# EAGLE board TALLER0 (EAGLE 7.6.0)

Size 100 x 80 mm. Coordinates in mm from the lower left corner, seen from the top.
Outline: 0,0 100,0 100,80 0,80 0,0
Copper layers (1*16): Top 0.035mm / dielectric 1.5mm / Bottom 0.035mm
Design rules "default": minimum track width 10mil, minimum drill 24mil, track to track 8mil, track to pad 8mil, pad to pad 8mil, via to via 8mil, smd to smd 8mil, copper to edge 40mil, drill to drill 8mil, minimum pad ring 10mil, minimum via ring 8mil, stop-mask expansion 4mil, vias tented up to drill 0mil, thermal gap 10mil

## Footprints (pad centres in the part's own frame; a part is rotated, then mirrored left to right if it is on the bottom)
DO-1N4148 = drill 0.9: A -3.81,0; C 3.81,0
DIL08 = drill 0.813 long: 1 -3.81,-3.81; 2 -1.27,-3.81; 3 1.27,-3.81; 4 3.81,-3.81; 5 3.81,3.81; 6 1.27,3.81; 7 -1.27,3.81; 8 -3.81,3.81
1X05-3.5MM = drill 1 pad 2.184: 1 7,0; 2 3.5,0; 3 0,0; 4 -3.5,0; 5 -7,0
JJM1C = drill 1.4: 1 4.05,5; 2 4.05,-5; NC -6.15,-5; NO -6.15,5 | drill 1.5: C 6.55,0
TO-5_V10 = drill 0.8 pad 1.4: 1 -2.7,0; 2 2.7,0
THUMBWHEELV = drill 1.4 pad 2.184: A -5,0; E 5,0; S 0,-0.5 | drill 3.2: SW1 -10,0; SW2 10,0
0207/10 = drill 0.813 pad 1.676 octagon: 1 -5.08,0; 2 5.08,0
320-938 = drill 2.007 octagon: 1 -2.388,4.013; 2 -2.388,0; 3 -2.388,-4.013; 4 2.388,4.013; 5 2.388,0; 6 2.388,-4.013
TO18 = drill 0.813 octagon: 1 -1.27,-1.27; 2 1.27,-1.27; 3 1.27,1.27

## Placement (x,y rotation side)
D1  [DO-1N4148]  -44.45,-48.26 0 top  (outside the outline)
IC1  LM741P  [DIL08]  39.37,44.45 0 top
J2  1X5  [1X05-3.5MM]  -27.94,-41.91 0 top  (outside the outline)
K1  JJM1-12V  [JJM1C]  -11.43,-29.21 0 top  (outside the outline)
PH1  V1060_32  [TO-5_V10]  -25.4,-27.94 0 top  (outside the outline)
POT2  THUMBPOTV  [THUMBWHEELV]  12.7,15.24 0 top
R1  [0207/10]  -13.97,-3.81 0 top  (outside the outline)
R2  [0207/10]  -13.97,-8.89 0 top  (outside the outline)
R3  [0207/10]  -13.97,-13.97 0 top  (outside the outline)
S1  [320-938]  -43.18,-34.29 0 top  (outside the outline)
T1  2N2222  [TO18]  -15.24,-19.05 0 top  (outside the outline)

## Library data of the parts
D1 J2 POT2 R1-R3 = adafruit
IC1 = opams
K1 = relay; MF: AROMAT/ MATSUSHITA; MPN: JJM1-12V; OC_FARNELL: unknown; OC_NEWARK: 10C7318
PH1 = photo-elements
S1 = switch
T1 = transistor-neu-to92

## Nets
GNDA: IC1.4 J2.2 POT2.A R1.1 R2.1 T1.1
N$1: PH1.2 R1.2
N$4: IC1.3 S1.1 S1.6
N$6: IC1.2 S1.3 S1.4
N$7: IC1.6 R3.2
N$8: R2.2 R3.1 T1.2
N$10: D1.A K1.2 T1.3
N$14: J2.5 K1.NO
N$15: J2.3
V+: D1.C IC1.7 J2.1 K1.1 PH1.1 POT2.E

## Tracks (layer width: path | path; a pad name or v marks a point on that pad's centre or on a via)
GNDA  (5 unrouted)
N$1  (1 unrouted)
N$4  (2 unrouted)
N$6  (2 unrouted)
N$7  (1 unrouted)
N$8  (2 unrouted)
N$10  (2 unrouted)
N$14  (1 unrouted)
V+  (5 unrouted)